# EAGLE board Daughter Card v7 fixed (EAGLE 8.4.1), part 1 of 2
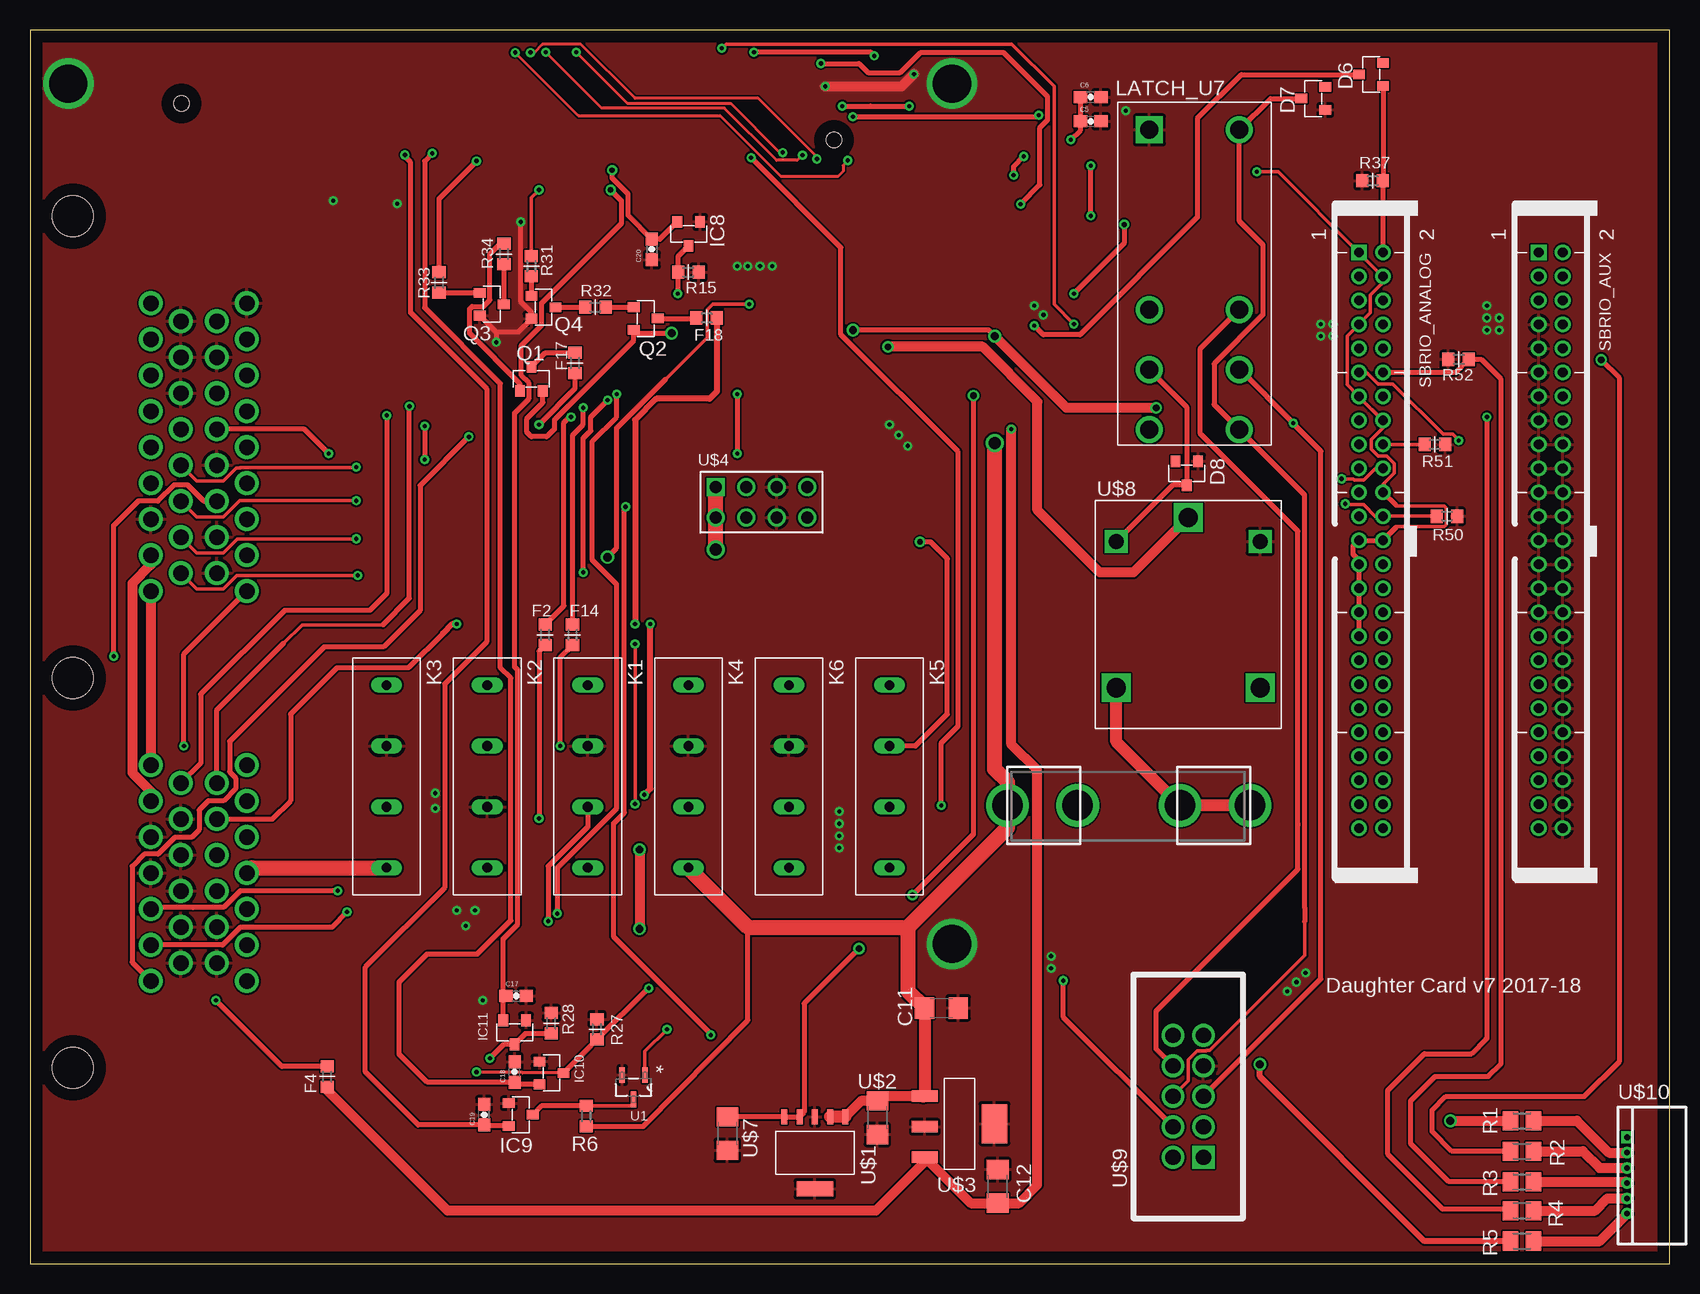
[diagram p0: board, top side]
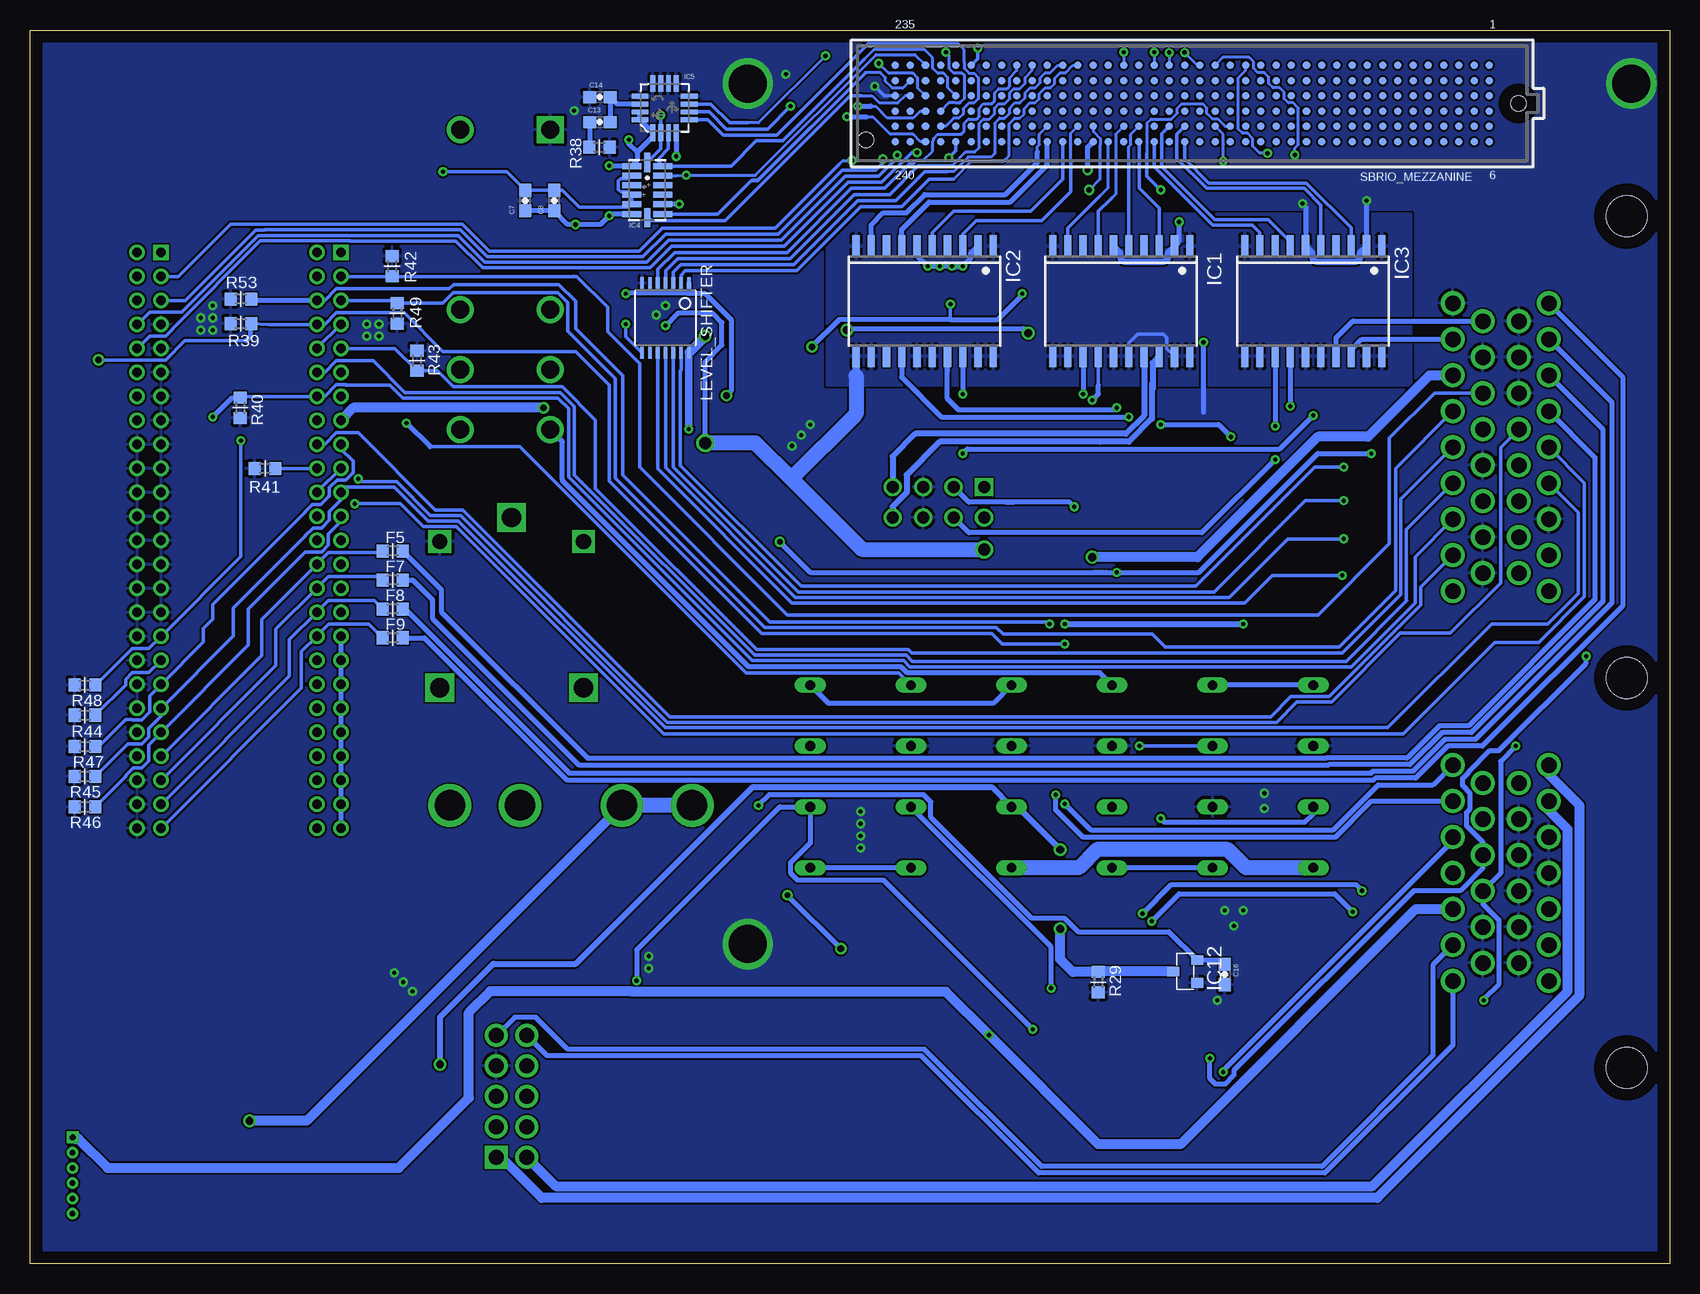
[diagram p1: board, bottom side, seen from below]

Size 136.65 x 102.87 mm. Coordinates in mm from the lower left corner, seen from the top.
Outline: 0,0 136.65,0 136.65,102.87 0,102.87 0,0
Copper layers (1*16): Top 0.035mm / dielectric 1.5mm / Bottom 0.035mm
Design rules "default *": minimum track width 10mil, minimum drill 12mil, track to track 6mil, track to pad 6mil, pad to pad 6mil, via to via 6mil, smd to smd 5mil, copper to edge 40mil, drill to drill 8mil, minimum pad ring 10mil, minimum via ring 8mil, stop-mask expansion 4mil, vias tented up to drill 0mil, thermal gap 10mil

## Footprints (pad centres in the part's own frame; a part is rotated, then mirrored left to right if it is on the bottom)
0603-CAP = smd 1.1 x 1: 1 -0.85,0; 2 0.85,0
C1206 = smd 1.6 x 1.8: 1 -1.4,0; 2 1.4,0
SOT-23-3 = smd 0.8 x 0.976: P$1 0,1; P$2 -0.95,-1; P$3 0.95,-1
R0603 = smd 1 x 1.1: 1 -0.85,0; 2 0.85,0
FUSE_5MM = drill 2.54 pad 3.556: 1 0,-10.1; 2 0,-4.258; 3 0,4.258; 4 0,10.1
PG-DSO-20 = smd 0.6 x 1.8: 1 -5.715,-4.6; 2 -4.445,-4.6; 3 -3.175,-4.6; 4 -1.905,-4.6; 5 -0.635,-4.6; 6 0.635,-4.6; 7 1.905,-4.6; 8 3.175,-4.6; 9 4.445,-4.6; 10 5.715,-4.6; 11 5.715,4.6; 12 4.445,4.6; 13 3.175,4.6; 14 1.905,4.6; 15 0.635,4.6; 16 -0.635,4.6; 17 -1.905,4.6; 18 -3.175,4.6; 19 -4.445,4.6; 20 -5.715,4.6
LGA14 = smd 0.5 x 1.6: 1 2,1.3; 2 1.2,1.3; 3 0.4,1.3; 4 -0.4,1.3; 5 -1.2,1.3; 6 -2,1.3; 8 -2,-1.3; 9 -1.2,-1.3; 10 -0.4,-1.3; 11 0.4,-1.3; 12 1.2,-1.3; 13 2,-1.3 | smd 1.6 x 0.5: 7 -2.3,0; 14 2.3,0
LGA16-4X4 = smd 1.4 x 0.4: 1 -2.05,0.975; 2 -2.05,0.325; 3 -2.05,-0.325; 4 -2.05,-0.975; 9 2.05,-0.975; 10 2.05,-0.325; 11 2.05,0.325; 12 2.05,0.975 | smd 0.4 x 1.4: 5 -0.975,-2.05; 6 -0.325,-2.05; 7 0.325,-2.05; 8 0.975,-2.05; 13 0.975,2.05; 14 0.325,2.05; 15 -0.325,2.05; 16 -0.975,2.05
HE3621A1250_SPST = drill 0.8 long: C+ -2.54,0; C- 2.54,0; S1 -7.62,0; S2 7.62,0
DPDT_JW2_FORM_C = drill 1.5: CENTER_1 -8,3.75; CENTER_2 -8,-3.75; COIL_2 12,-3.75; NC_1 -3,3.75; NC_2 -3,-3.75; NO_1 -13,3.75; NO_2 -13,-3.75 | drill 1.5 square: COIL_1 12,3.75
TSSOP14 = smd 0.305 x 0.991: 1 -1.95,-2.918; 2 -1.3,-2.918; 3 -0.65,-2.918; 4 0,-2.918; 5 0.65,-2.918; 6 1.3,-2.918; 7 1.95,-2.918; 8 1.95,2.918; 9 1.3,2.918; 10 0.65,2.918; 11 0,2.918; 12 -0.65,2.918; 13 -1.3,2.918; 14 -1.95,2.918
M0805 = smd 1.3 x 1.6: 1 -0.95,0; 2 0.95,0
SBRIO_J502_J503 = drill 0.8 square: P$1 0,0 | drill 0.8: P$2 0,2; P$3 2,0; P$4 2,2; P$5 4,0; P$6 4,2; P$7 6,0; P$8 6,2; P$9 8,0; P$10 8,2; P$11 10,0; P$12 10,2; P$13 12,0; P$14 12,2; P$15 14,0; P$16 14,2; P$17 16,0; P$18 16,2; P$19 18,0; P$20 18,2; P$21 20,0; P$22 20,2; P$23 22,0; P$24 22,2; P$25 24,0; P$26 24,2; P$27 26,0; P$28 26,2; P$29 28,0; P$30 28,2; P$31 30,0; P$32 30,2; P$33 32,0; P$34 32,2; P$35 34,0; P$36 34,2; P$37 36,0; P$38 36,2; P$39 38,0; P$40 38,2; P$41 40,0; P$42 40,2; P$43 42,0; P$44 42,2; P$45 44,0; P$46 44,2; P$47 46,0; P$48 46,2; P$49 48,0; P$50 48,2
SEAM-40-XX.X-XX-06-X-A = smd 0.635 x 0.635: 1 24.765,3.175; 2 24.765,1.905; 3 24.765,0.635; 4 24.765,-0.635; 5 24.765,-1.905; 6 24.765,-3.175; 7 23.495,3.175; 8 23.495,1.905; 9 23.495,0.635; 10 23.495,-0.635; 11 23.495,-1.905; 12 23.495,-3.175; 13 22.225,3.175; 14 22.225,1.905; 15 22.225,0.635; 16 22.225,-0.635; 17 22.225,-1.905; 18 22.225,-3.175; 19 20.955,3.175; 20 20.955,1.905; 21 20.955,0.635; 22 20.955,-0.635; 23 20.955,-1.905; 24 20.955,-3.175; 25 19.685,3.175; 26 19.685,1.905; 27 19.685,0.635; 28 19.685,-0.635; 29 19.685,-1.905; 30 19.685,-3.175; 31 18.415,3.175; 32 18.415,1.905; 33 18.415,0.635; 34 18.415,-0.635; 35 18.415,-1.905; 36 18.415,-3.175; 37 17.145,3.175; 38 17.145,1.905; 39 17.145,0.635; 40 17.145,-0.635; 41 17.145,-1.905; 42 17.145,-3.175; 43 15.875,3.175; 44 15.875,1.905; 45 15.875,0.635; 46 15.875,-0.635; 47 15.875,-1.905; 48 15.875,-3.175; 49 14.605,3.175; 50 14.605,1.905; 51 14.605,0.635; 52 14.605,-0.635; 53 14.605,-1.905; 54 14.605,-3.175; 55 13.335,3.175; 56 13.335,1.905; 57 13.335,0.635; 58 13.335,-0.635; 59 13.335,-1.905; 60 13.335,-3.175; 61 12.065,3.175; 62 12.065,1.905; 63 12.065,0.635; 64 12.065,-0.635; 65 12.065,-1.905; 66 12.065,-3.175; 67 10.795,3.175; 68 10.795,1.905; 69 10.795,0.635; 70 10.795,-0.635; 71 10.795,-1.905; 72 10.795,-3.175; 73 9.525,3.175; 74 9.525,1.905; 75 9.525,0.635; 76 9.525,-0.635; 77 9.525,-1.905; 78 9.525,-3.175; 79 8.255,3.175; 80 8.255,1.905; 81 8.255,0.635; 82 8.255,-0.635; 83 8.255,-1.905; 84 8.255,-3.175; 85 6.985,3.175; 86 6.985,1.905; 87 6.985,0.635; 88 6.985,-0.635; 89 6.985,-1.905; 90 6.985,-3.175; 91 5.715,3.175; 92 5.715,1.905; 93 5.715,0.635; 94 5.715,-0.635; 95 5.715,-1.905; 96 5.715,-3.175; 97 4.445,3.175; 98 4.445,1.905; 99 4.445,0.635; 100 4.445,-0.635; 101 4.445,-1.905; 102 4.445,-3.175; 103 3.175,3.175; 104 3.175,1.905; 105 3.175,0.635; 106 3.175,-0.635; 107 3.175,-1.905; 108 3.175,-3.175; 109 1.905,3.175; 110 1.905,1.905; 111 1.905,0.635; 112 1.905,-0.635; 113 1.905,-1.905; 114 1.905,-3.175; 115 0.635,3.175; 116 0.635,1.905; 117 0.635,0.635; 118 0.635,-0.635; 119 0.635,-1.905; 120 0.635,-3.175; 121 -0.635,3.175; 122 -0.635,1.905; 123 -0.635,0.635; 124 -0.635,-0.635; 125 -0.635,-1.905; 126 -0.635,-3.175; 127 -1.905,3.175; 128 -1.905,1.905; 129 -1.905,0.635; 130 -1.905,-0.635; 131 -1.905,-1.905; 132 -1.905,-3.175; 133 -3.175,3.175; 134 -3.175,1.905; 135 -3.175,0.635; 136 -3.175,-0.635; 137 -3.175,-1.905; 138 -3.175,-3.175; 139 -4.445,3.175; 140 -4.445,1.905; 141 -4.445,0.635; 142 -4.445,-0.635; 143 -4.445,-1.905; 144 -4.445,-3.175; 145 -5.715,3.175; 146 -5.715,1.905; 147 -5.715,0.635; 148 -5.715,-0.635; 149 -5.715,-1.905; 150 -5.715,-3.175; 151 -6.985,3.175; 152 -6.985,1.905; 153 -6.985,0.635; 154 -6.985,-0.635; 155 -6.985,-1.905; 156 -6.985,-3.175; 157 -8.255,3.175; 158 -8.255,1.905; 159 -8.255,0.635; 160 -8.255,-0.635; 161 -8.255,-1.905; 162 -8.255,-3.175; 163 -9.525,3.175; 164 -9.525,1.905; 165 -9.525,0.635; 166 -9.525,-0.635; 167 -9.525,-1.905; 168 -9.525,-3.175; 169 -10.795,3.175; 170 -10.795,1.905; 171 -10.795,0.635; 172 -10.795,-0.635; 173 -10.795,-1.905; 174 -10.795,-3.175; 175 -12.065,3.175; 176 -12.065,1.905; 177 -12.065,0.635; 178 -12.065,-0.635; 179 -12.065,-1.905; 180 -12.065,-3.175; 181 -13.335,3.175; 182 -13.335,1.905; 183 -13.335,0.635; 184 -13.335,-0.635; 185 -13.335,-1.905; 186 -13.335,-3.175; 187 -14.605,3.175; 188 -14.605,1.905; 189 -14.605,0.635; 190 -14.605,-0.635; 191 -14.605,-1.905; 192 -14.605,-3.175; 193 -15.875,3.175; 194 -15.875,1.905; 195 -15.875,0.635; 196 -15.875,-0.635; 197 -15.875,-1.905; 198 -15.875,-3.175; 199 -17.145,3.175; 200 -17.145,1.905; 201 -17.145,0.635; 202 -17.145,-0.635; 203 -17.145,-1.905; 204 -17.145,-3.175; 205 -18.415,3.175; 206 -18.415,1.905; 207 -18.415,0.635; 208 -18.415,-0.635; 209 -18.415,-1.905; 210 -18.415,-3.175; 211 -19.685,3.175; 212 -19.685,1.905; 213 -19.685,0.635; 214 -19.685,-0.635; 215 -19.685,-1.905; 216 -19.685,-3.175; 217 -20.955,3.175; 218 -20.955,1.905; 219 -20.955,0.635; 220 -20.955,-0.635; 221 -20.955,-1.905; 222 -20.955,-3.175; 223 -22.225,3.175; 224 -22.225,1.905; 225 -22.225,0.635; 226 -22.225,-0.635; 227 -22.225,-1.905; 228 -22.225,-3.175; 229 -23.495,3.175; 230 -23.495,1.905; 231 -23.495,0.635; 232 -23.495,-0.635; 233 -23.495,-1.905; 234 -23.495,-3.175; 235 -24.765,3.175; 236 -24.765,1.905; 237 -24.765,0.635; 238 -24.765,-0.635; 239 -24.765,-1.905; 240 -24.765,-3.175 | hole 1.27: 27.191,0; -27.191,-3.048
SOT95P235X112-3N = smd 1.321 x 0.457: 1 -1.016,0.94; 2 -1.016,-0.94; 3 1.016,0
TPS7A4533 = smd 0.508 x 1.27: P$1 -2.54,-2.997; P$2 -1.27,-2.997; P$3 0,-2.997; P$4 1.27,-2.997; P$5 2.54,-2.997 | smd 3.048 x 1.27: P$6 0,2.997
SOT-223-4 = smd 0.95 x 2.15: 1 -2.3,-2.9; 2 0.24,-2.9; 3 2.78,-2.9 | smd 3.25 x 2.15: 4 0,2.9
HARWIN_M20-9980445 = drill 1 square: P1 -3.81,1.27 | drill 1: P2 -1.27,1.27; P3 1.27,1.27; P4 3.81,1.27; P5 -3.81,-1.27; P6 -1.27,-1.27; P7 1.27,-1.27; P8 3.81,-1.27
SUPERSEAL1.0_60POS = drill 1.3 pad 2: A1 7.288,14.526; A2 10.288,14.526; A3 13.288,14.526; A4 16.288,14.526; A5 19.288,14.526; A6 22.288,14.526; A7 25.288,14.526; A8 28.288,14.526; A9 31.288,14.526; A10 8.788,12.026; A11 11.788,12.026; A12 14.788,12.026; A13 17.788,12.026; A14 20.788,12.026; A15 23.788,12.026; A16 26.788,12.026; A17 29.788,12.026; A18 8.788,9.026; A19 11.788,9.026; A20 14.788,9.026; A21 17.788,9.026; A22 20.788,9.026; A23 23.788,9.026; A24 26.788,9.026; A25 29.788,9.026; A26 7.288,6.526; A27 10.288,6.526; A28 13.288,6.526; A29 16.288,6.526; A30 19.288,6.526; A31 22.288,6.526; A32 25.288,6.526; A33 28.288,6.526; A34 31.288,6.526; B1 45.788,14.526; B2 48.788,14.526; B3 51.788,14.526; B4 54.788,14.526; B5 57.788,14.526; B6 60.788,14.526; B7 63.788,14.526; B8 47.288,12.026; B9 50.288,12.026; B10 53.288,12.026; B11 56.288,12.026; B12 59.288,12.026; B13 62.288,12.026; B14 47.288,9.026; B15 50.288,9.026; B16 53.288,9.026; B17 56.288,9.026; B18 59.288,9.026; B19 62.288,9.026; B20 45.788,6.526; B21 48.788,6.526; B22 51.788,6.526; B23 54.788,6.526; B24 57.788,6.526; B25 60.788,6.526; B26 63.788,6.526 | hole 3.4: 0.038,0.026; 38.538,0.026; 71.038,0.026
RELAY = drill 1.6 square: A 14.199,-5.994; B 14.199,5.994; CENTER 0,0 | drill 1.27 square: V1 2.007,5.994; V2 2.007,-5.994
SBRIO_W = drill 1.27 pad 1.778 square: P$1 -5.08,-1.27 | drill 1.27 pad 1.778: P$2 -5.08,1.27; P$3 -2.54,-1.27; P$4 -2.54,1.27; P$5 0,-1.27; P$6 0,1.27; P$7 2.54,-1.27; P$8 2.54,1.27; P$9 5.08,-1.27; P$10 5.08,1.27
SULLINS_1MM_HEADER = drill 0.5 pad 0.61 square: P1 0,0 | drill 0.45 pad 0.61: P2 1.27,0; P3 2.54,0; P4 3.81,0; P5 5.08,0; P6 6.35,0

## Placement (x,y rotation side)
C5  .1uF  [0603-CAP]  88.39,95.25 0 top
C6  10uF  [0603-CAP]  88.39,97.28 0 top
C7  .1uF  [0603-CAP]  95.38,88.65 90 bottom
C8  1uF  [0603-CAP]  92.96,88.65 90 bottom
C11  0.1uF  [C1206]  75.95,21.34 0 top
C12  0.22uF  [C1206]  80.64,6.48 90 top
C13  470nF  [0603-CAP]  89.15,95.2 0 bottom
C14  10nF  [0603-CAP]  89.15,97.28 0 bottom
C16  1uF  [0603-CAP]  37.08,24.13 270 bottom
C17  1uF  [0603-CAP]  40.51,22.35 0 top
C18  1uF  [0603-CAP]  40.39,16 90 top
C19  1uF  [0603-CAP]  37.85,12.45 90 top
C20  1uF  [0603-CAP]  51.82,84.58 270 top
D6  MMBZ5238B-7-F  [SOT-23-3]  111.76,99.16 90 top
D7  DIODE_MMBD4448  [SOT-23-3]  106.93,97.16 90 top
D8  DIODE_MMBD4448  [SOT-23-3]  96.39,65.91 180 top
F2  250mA  [R0603]  42.93,52.45 270 top
F3  FUSEX20MM  [FUSE_5MM]  91.57,38.23 90 top
F4  0.5A PTC  [R0603]  24.77,15.62 90 top
F5  10mA PTC  [R0603]  106.43,59.44 0 bottom
F7  10mA PTC  [R0603]  106.43,57.02 0 bottom
F8  10mA PTC  [R0603]  106.43,54.61 0 bottom
F9  10mA PTC  [R0603]  106.43,52.2 0 bottom
F14  250mA  [R0603]  45.21,52.45 270 top
F17  1A PTC  [R0603]  45.42,75.11 90 top
F18  1A PTC  [R0603]  56.39,78.87 180 top
IC1  BTS716G  [PG-DSO-20]  45.72,80.26 180 bottom
IC2  BTS716G  [PG-DSO-20]  62.1,80.26 180 bottom
IC3  BTS716G  [PG-DSO-20]  29.72,80.26 180 bottom
IC4  ADXL345  [LGA14]  85.22,89.53 90 bottom
IC5  L3G4200D  [LGA16-4X4]  83.77,96.37 90 bottom
IC8  MIC5225-3.3YM5-TR  [SOT-23-3]  54.89,85.88 180 top
IC9  MIC5225-3.3YM5-TR  [SOT-23-3]  40.89,12.45 270 top
IC10  MIC5225-3.3YM5-TR  [SOT-23-3]  43.46,15.93 270 top
IC11  MIC5225-3.3YM5-TR  [SOT-23-3]  40.39,19.3 180 top
IC12  MIC5225-3.3YM5-TR  [SOT-23-3]  40.39,24.38 90 bottom
K1  HE3621A1250_SPST  [HE3621A1250_SPST]  46.48,40.64 90 top
K2  HE3621A1250_SPST  [HE3621A1250_SPST]  38.1,40.64 270 top
K3  HE3621A1250_SPST  [HE3621A1250_SPST]  29.72,40.64 90 top
K4  HE3621A1250_SPST  [HE3621A1250_SPST]  54.86,40.64 90 top
K5  HE3621A1250_SPST  [HE3621A1250_SPST]  71.63,40.64 270 top
K6  HE3621A1250_SPST  [HE3621A1250_SPST]  63.25,40.64 90 top
LATCH_U7  JW2SN-DC12V  [DPDT_JW2_FORM_C]  97.03,82.55 90 top
LEVEL_SHIFTER  [TSSOP14]  83.69,78.87 180 bottom
Q1  MMBT4403-7-F  [SOT-23-3]  41.78,73.79 0 top
Q2  MMBT4403-7-F  [SOT-23-3]  51.31,78.82 270 top
Q3  MMBT4401-7-F  [SOT-23-3]  38.48,80.01 270 top
Q4  MMBT4401-7-F  [SOT-23-3]  42.8,79.76 270 top
R1  0  [M0805]  124.33,11.94 180 top
R2  0  [M0805]  124.33,9.4 180 top
R3  0  [M0805]  124.33,6.86 180 top
R4  0  [M0805]  124.33,4.45 180 top
R5  0  [M0805]  124.33,1.91 180 top
R6  100K  [R0603]  46.35,12.32 90 top
R15  10K  [R0603]  54.86,82.68 0 top
R27  10K  [R0603]  47.24,19.56 90 top
R28  10K  [R0603]  43.43,20.07 90 top
R29  10K  [R0603]  47.62,23.5 270 bottom
R31  4.7K  [R0603]  41.78,83.19 270 top
R32  4.7K  [R0603]  47.12,79.76 0 top
R33  4.7K  [R0603]  34.09,81.81 270 top
R34  4.7K  [R0603]  39.5,84.2 90 top
R37  10K  [R0603]  111.89,90.3 0 top
R38  10K  [R0603]  89.2,93.09 0 bottom
R39  100k  [R0603]  119.08,78.38 180 bottom
R40  100k  [R0603]  119.13,71.37 270 bottom
R41  100k  [R0603]  117.07,66.32 180 bottom
R42  100k  [R0603]  106.48,83.19 90 bottom
R43  100k  [R0603]  104.39,75.31 90 bottom
R44  100k  [R0603]  132.08,45.75 180 bottom
R45  100k  [R0603]  132.08,40.64 180 bottom
R46  100k  [R0603]  132.08,38.1 0 bottom
R47  100k  [R0603]  132.08,43.13 0 bottom
R48  100k  [R0603]  132.08,48.26 0 bottom
R49  100k  [R0603]  106.05,79.25 90 bottom
R50  100k  [R0603]  118.08,62.33 180 top
R51  100k  [R0603]  117.07,68.33 180 top
R52  100k  [R0603]  119.05,75.41 0 top
R53  100k  [R0603]  119.08,80.44 0 bottom
SBRIO_ANALOG  SBRIO_MIO  [SBRIO_J502_J503]  110.74,84.33 270 top
SBRIO_AUX  SBRIO_AUX  [SBRIO_J502_J503]  125.73,84.33 270 top
SBRIO_MEZZANINE  SBRIO_RMC  [SEAM-40-XX.X-XX-06-X-A]  39.8,96.75 0 bottom
U1  DMN3404L-7  [SOT95P235X112-3N]  50.29,14.73 270 top
U$1  TPS7A4533  [TPS7A4533]  65.41,9.27 180 top
U$2  10uF  [C1206]  70.61,12.19 270 top
U$3  LM340MP-5.0  [SOT-223-4]  77.47,11.68 270 top
U$4  HARWIN_M20-9980445  [HARWIN_M20-9980445]  60.96,63.5 0 top
U$6  SUPERSEAL1.0_60POS  [SUPERSEAL1.0_60POS]  3.56,87.38 270 top
U$7  10uF  [C1206]  58.12,10.87 270 top
U$8  RELAY  [RELAY]  96.52,62.23 270 top
U$9  SBRIO_BMS_CONN  [SBRIO_W]  96.52,13.97 90 top
U$10  SULLINS_1MM_6P_HEADER  [SULLINS_1MM_HEADER]  133.1,10.54 270 top

## Library data of the parts
C5-C8 C13 C14 C16-C20 F3 = SparkFun-Passives
C11 C12 U$2 U$7 = rcl
D6-D8 K1-K6 LATCH_U7 Q1-Q4 SBRIO_ANALOG SBRIO_AUX U$4 U$8-U$10 = formula electric
F2 F4 F5 F7-F9 F14 F17 F18 R1-R5 R15 R27-R29 R31-R34 R37-R53 = resistor
IC1-IC3 = infineon; OC_FARNELL: unknown; OC_NEWARK: unknown
IC4 IC5 = SparkFun-Sensors
IC8-IC12 = formula electric; DIGIKEYPN: MCP1703T-3302E/CBCT-ND
LEVEL_SHIFTER = SparkFun-DigitalIC
R6 = adafruit
SBRIO_MEZZANINE = SEAM-40-XX.X-XX-06-X-A
U1 = diodes-inc-e14; MPN: DMN3404L-7; OC_FARNELL: 1858601; OC_NEWARK: 23T5605; PACKAGE: SOT-23-3; SUPPLIER: Diodes Inc
U$1 = Texas Instruments_By_element14_Batch_1; DIGIKEY_P-N: 490-12344-1-ND; P-N: GRT21BC81C106ME01L
U$3 = texas
U$6 = TE

## Nets
3.3V: C5.1 C6.1 C7.1 C8.1 IC4.1 IC4.6 IC5.1 IC5.15 IC5.16 LEVEL_SHIFTER.1 U$1.P$4 U$1.P$5 U$7.1
5V: C12.1 F4.1 LEVEL_SHIFTER.14 Q1.P$3 Q2.P$3 SBRIO_ANALOG.P$15 U$3.3
5V_FUSED: F4.2 U$6.A9 U$6.B11
5V_IO_1: F17.1 U$6.B26
12V: C11.1 D6.P$1 F3.3 F3.4 IC1.1 IC1.10 IC1.11 IC1.12 IC1.15 IC1.16 IC1.19 IC1.20 IC2.1 IC2.10 IC2.11 IC2.12 IC2.15 IC2.16 IC2.19 IC2.20 IC3.1 IC3.10 IC3.11 IC3.12 IC3.15 IC3.16 IC3.19 IC3.20 K3.S1 K4.S1 R1.2 R6.1 U$1.P$1 U$1.P$2 U$2.1 U$3.1 U$4.P1 U$4.P5 U$6.B4
ACCUMULATOR_FANS: IC1.18 U$4.P8
AI7: R50.2 SBRIO_ANALOG.P$24 U$6.A30
AI8: R42.1 SBRIO_ANALOG.P$3 U$6.A12
AI9: R49.2 SBRIO_ANALOG.P$5 U$6.A4
AI10: R43.1 SBRIO_ANALOG.P$9 U$6.A5
AI11: R48.2 SBRIO_ANALOG.P$11 SBRIO_AUX.P$33
AI12: R44.1 SBRIO_AUX.P$35
AI13: R47.2 SBRIO_ANALOG.P$17 SBRIO_AUX.P$37
AI15: R46.2 SBRIO_ANALOG.P$23 SBRIO_AUX.P$41
AMS_OK-: K5.C- U1.1 U$9.P$4
AO0: F5.1 SBRIO_ANALOG.P$28 SBRIO_AUX.P$43
AO1: F7.1 SBRIO_ANALOG.P$30 SBRIO_AUX.P$45
AO2: F8.1 SBRIO_ANALOG.P$32 SBRIO_AUX.P$47
AO3: F9.1 SBRIO_ANALOG.P$34 SBRIO_AUX.P$49
BMS_CAN_H: U$6.B7 U$9.P$10
BMS_CAN_L: U$6.B6 U$9.P$9
BMS_SOC: U$9.P$3
BRAKE_PRESS_IN_1: R3.2 R52.2 SBRIO_ANALOG.P$12 U$6.A6
BRAKE_PRESS_IN_2: R4.2 R40.1 SBRIO_ANALOG.P$14 U$6.A7
BRAKELIGHT: IC3.17 U$6.A10
BSPD_OK+: IC12.P$1 K4.C+ R5.2 R29.1
BUZZER_OUT: IC3.18 U$6.A2
CAN_H: U$6.A33 U$6.B21 U$9.P$2
CAN_L: U$6.A34 U$6.B20 U$9.P$1
COOLANT_PUMP: IC1.17 U$4.P4
DC_DC_DISABLE: F18.1 U$6.B9
DIO0: IC4.14 IC5.2 SBRIO_MEZZANINE.228
DIO1: C16.1 IC12.P$3 SBRIO_MEZZANINE.216
DIO2: SBRIO_MEZZANINE.210
DIO3: SBRIO_MEZZANINE.198
DIO4: SBRIO_MEZZANINE.192
DIO5: IC2.7 SBRIO_MEZZANINE.180
DIO6: IC2.5 SBRIO_MEZZANINE.174
DIO7: C20.1 IC8.P$3 SBRIO_MEZZANINE.162
DIO8: IC1.9 SBRIO_MEZZANINE.156
DIO9: IC1.3 SBRIO_MEZZANINE.144
DIO10: IC3.9 SBRIO_MEZZANINE.138
DIO11: IC3.3 SBRIO_MEZZANINE.126
DIO12: SBRIO_MEZZANINE.120
DIO13: SBRIO_MEZZANINE.108
DIO14: SBRIO_MEZZANINE.102
DIO15: SBRIO_MEZZANINE.90
DIO16: IC4.7 SBRIO_MEZZANINE.231
DIO17: IC4.9 SBRIO_MEZZANINE.225
DIO18: IC4.13 IC5.3 SBRIO_MEZZANINE.213
DIO19: SBRIO_MEZZANINE.207
DIO20: SBRIO_MEZZANINE.195
DIO21: SBRIO_MEZZANINE.189
DIO22: SBRIO_MEZZANINE.177
DIO23: SBRIO_MEZZANINE.171
DIO24: SBRIO_MEZZANINE.159
DIO25: SBRIO_MEZZANINE.153
DIO26: SBRIO_MEZZANINE.141
DIO27: SBRIO_MEZZANINE.135
DIO28: SBRIO_MEZZANINE.123
DIO29: SBRIO_MEZZANINE.117
DIO30: SBRIO_MEZZANINE.105
DIO31: SBRIO_MEZZANINE.99
DIO32: IC5.5 SBRIO_MEZZANINE.221
DIO33: SBRIO_MEZZANINE.215
DIO34: SBRIO_MEZZANINE.203
DIO35: SBRIO_MEZZANINE.197
DIO36: SBRIO_MEZZANINE.185
DIO37: IC2.9 SBRIO_MEZZANINE.179
DIO38: IC2.3 SBRIO_MEZZANINE.167
DIO39: C17.1 IC11.P$3 SBRIO_MEZZANINE.161
DIO40: IC1.7 SBRIO_MEZZANINE.149
DIO41: IC1.5 SBRIO_MEZZANINE.143
DIO42: IC3.7 SBRIO_MEZZANINE.131
DIO43: IC3.5 SBRIO_MEZZANINE.125
DIO44: R33.1 SBRIO_MEZZANINE.113
DIO45: R31.1 SBRIO_MEZZANINE.107
DIO48: IC4.8 SBRIO_MEZZANINE.230
DIO64: IC5.6 SBRIO_MEZZANINE.226
DIO65: IC5.7 SBRIO_MEZZANINE.220
DIO80: SBRIO_MEZZANINE.235
DIO81: IC4.12 IC5.4 SBRIO_MEZZANINE.223
DIO82: SBRIO_MEZZANINE.217
DIO83: LEVEL_SHIFTER.8 SBRIO_MEZZANINE.205
DIO84: SBRIO_MEZZANINE.199
DIO85: LEVEL_SHIFTER.5 SBRIO_MEZZANINE.187
DIO86: LEVEL_SHIFTER.4 SBRIO_MEZZANINE.181
DIO87: LEVEL_SHIFTER.3 SBRIO_MEZZANINE.169
DIO88: LEVEL_SHIFTER.2 SBRIO_MEZZANINE.163
DIO89: SBRIO_AUX.P$12
DIO90: SBRIO_AUX.P$10 SBRIO_MEZZANINE.145
DIO91: SBRIO_AUX.P$8 SBRIO_MEZZANINE.133
DIO92: SBRIO_AUX.P$5 SBRIO_MEZZANINE.127
DIO93: SBRIO_AUX.P$3 SBRIO_MEZZANINE.115
DIO94: C19.1 IC9.P$3 SBRIO_MEZZANINE.109
DIO95: C18.1 IC10.P$3 SBRIO_MEZZANINE.97
DIO_GND: C7.2 C8.2 IC4.2 IC4.4 IC4.5 SBRIO_ANALOG.P$1 SBRIO_ANALOG.P$4 SBRIO_ANALOG.P$7 SBRIO_ANALOG.P$10 SBRIO_ANALOG.P$13 SBRIO_ANALOG.P$16 SBRIO_ANALOG.P$19 SBRIO_ANALOG.P$22 SBRIO_ANALOG.P$25 SBRIO_ANALOG.P$26 SBRIO_ANALOG.P$27 SBRIO_ANALOG.P$29 SBRIO_ANALOG.P$31 SBRIO_ANALOG.P$33 SBRIO_ANALOG.P$35 SBRIO_ANALOG.P$37 SBRIO_ANALOG.P$39 SBRIO_ANALOG.P$41 SBRIO_ANALOG.P$43 SBRIO_ANALOG.P$45 SBRIO_ANALOG.P$47 SBRIO_ANALOG.P$49
FAN_PWM_OUT: IC3.13 U$4.P6
GND: C5.2 C6.2 C11.2 C12.2 C14.1 C16.2 C17.2 C18.2 C19.2 C20.2 D7.P$2 D8.P$2 IC1.2 IC1.6 IC2.2 IC2.6 IC3.2 IC3.6 IC5.8 IC5.9 IC5.10 IC5.11 IC5.12 IC5.13 IC8.P$2 IC9.P$2 IC10.P$2 IC11.P$2 IC12.P$2 K1.C- K2.C- K3.C- K4.C- K6.C- LATCH_U7.COIL_1 LEVEL_SHIFTER.7 Q3.P$3 Q4.P$3 R15.2 R27.2 R28.2 R29.2 R37.1 R38.2 R39.2 R40.2 R41.2 R42.2 R43.2 R44.2 R45.2 R46.1 R47.1 R48.1 R49.1 R50.1 R51.1 R52.1 R53.1 SBRIO_AUX.P$7 SBRIO_AUX.P$9 SBRIO_AUX.P$11 SBRIO_AUX.P$13 SBRIO_AUX.P$15 SBRIO_AUX.P$17 SBRIO_AUX.P$18 SBRIO_AUX.P$19 SBRIO_AUX.P$20 SBRIO_AUX.P$21 SBRIO_AUX.P$22 SBRIO_AUX.P$23 SBRIO_AUX.P$24 SBRIO_AUX.P$25 SBRIO_AUX.P$26 SBRIO_AUX.P$27 SBRIO_AUX.P$28 SBRIO_AUX.P$29 SBRIO_AUX.P$30 SBRIO_AUX.P$31 SBRIO_AUX.P$32 SBRIO_AUX.P$34 SBRIO_AUX.P$36 SBRIO_AUX.P$38 SBRIO_AUX.P$40 SBRIO_AUX.P$42 SBRIO_AUX.P$44 SBRIO_AUX.P$46 SBRIO_AUX.P$48 SBRIO_AUX.P$50 SBRIO_MEZZANINE.237 U1.2 U$1.P$3 U$1.P$6 U$2.2 U$3.2 U$3.4 U$4.P3 U$4.P7 U$6.A1 U$6.A11 U$6.A14 U$6.A16 U$6.A17 U$6.A18 U$6.A19 U$6.A20 U$6.A32 U$6.B12 U$6.B13 U$6.B15 U$6.B16 U$6.B17 U$6.B18 U$6.B19 U$6.B22 U$6.B23 U$7.2 U$8.V1 U$9.P$7
HIGH_CURRENT_IN: R2.2 R39.1 SBRIO_ANALOG.P$8 U$6.B1
IMD_OK+: IC10.P$1 K6.C+ R27.1 U$6.B3
INTER_OK+: K1.C+ U$6.B25
K4: K4.S2 K5.S1
LATCH_LED+: LATCH_U7.NC_2 U$9.P$8
LATCH_SW_IN: D7.P$1 LATCH_U7.COIL_2 LATCH_U7.NO_2 U$9.P$6
LATCH_SW_OUT: K6.S2 LATCH_U7.CENTER_2 U$9.P$5
LOW_CURRENT_IN: R53.2 SBRIO_ANALOG.P$6 U$6.B2
N$2: K2.S1 K3.S2
N$3: F5.2 U$6.A29
N$4: D6.P$2 R37.2 SBRIO_ANALOG.P$2
N$5: Q1.P$2 R34.2
N$6: F7.2 U$6.A28
N$7: K1.S1 K2.S2
N$8: Q3.P$1 R34.1
N$9: F8.2 U$6.A27
N$10: F9.2 U$6.A26
N$11: C13.1 R38.1
N$12: R1.1 U$10.P2
N$13: K5.S2 K6.S1
N$14: F3.1 F3.2 U$8.A
N$15: R2.1 U$10.P3
N$16: R3.1 U$10.P4
N$17: R4.1 U$10.P5
N$18: Q4.P$1 R32.1
N$19: Q4.P$2 R31.2
N$20: R5.1 U$10.P6
N$22: Q3.P$2 R33.2
N$24: IC9.P$1 R6.2 U1.3
N$37: C13.2 C14.2 IC5.14
N$56: F17.2 Q1.P$1
N$57: F18.2 Q2.P$1
N$58: Q2.P$2 R32.2
PO3: IC1.14 K5.C+ U$6.A13
POSITIVE_AIR_ENABLE: IC3.14 U$6.B8
PRECHARGE_DONE+: IC1.13 U$6.B24
SBRIO_OK+_1: F2.1 IC2.14
SBRIO_OK+_1_RELAY_IN: F2.2 K3.C+
SBRIO_OK+_2: F14.1 IC2.17
SBRIO_OK_2_RELAY: F14.2 K2.C+
SHUTDOWN_3: IC2.13
SHUTDOWN_OK+: K1.S2 LATCH_U7.NO_1
SIGNAL_GND: U$4.P2 U$6.B5 U$10.P1
STEERING_POS: R45.1 SBRIO_ANALOG.P$21 SBRIO_AUX.P$39 U$6.A31
THROTTLE_IN_1: R51.2 SBRIO_ANALOG.P$18 U$6.A8
THROTTLE_IN_2: R41.1 SBRIO_ANALOG.P$20 U$6.A21
THROTTLE_OK_OUT: IC2.18 U$6.B14
TSMS_IN+: IC11.P$1 R28.1 U$6.A15 U$6.B10
TSMS_OUT+: IC8.P$1 R15.1 U$6.A3 U$8.CENTER
TSMS_OUT_CTRL+: D8.P$1 LATCH_U7.CENTER_1 U$8.V2
VCC: SBRIO_MEZZANINE.236
WS1: LEVEL_SHIFTER.13 U$6.A22
WS2: LEVEL_SHIFTER.12 U$6.A23
WS3: LEVEL_SHIFTER.11 U$6.A24
WS4: LEVEL_SHIFTER.10 U$6.A25